# EAGLE board 909 Rim (EAGLE 9.0.0)
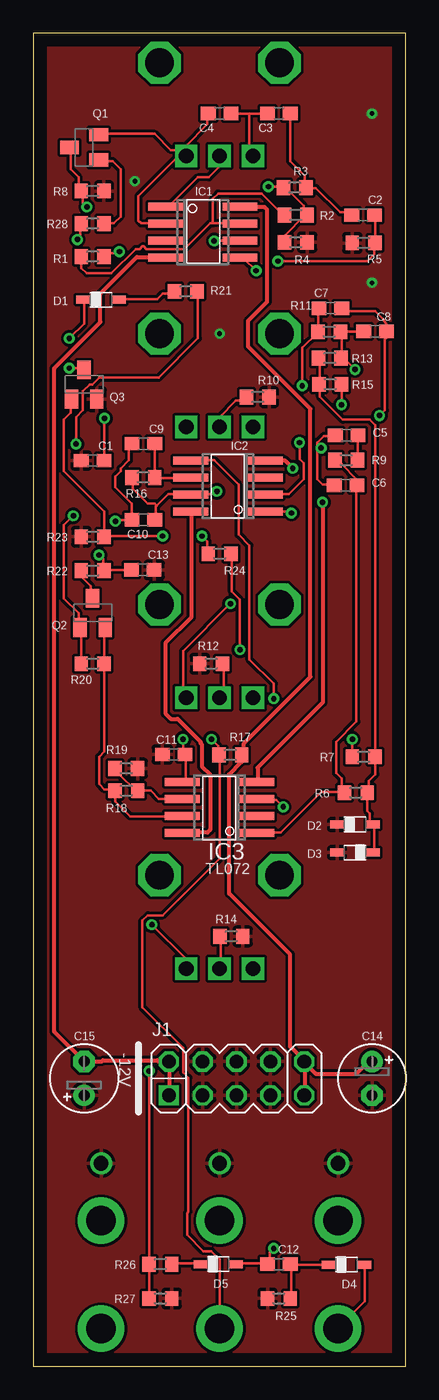
[diagram p0: board, top side]
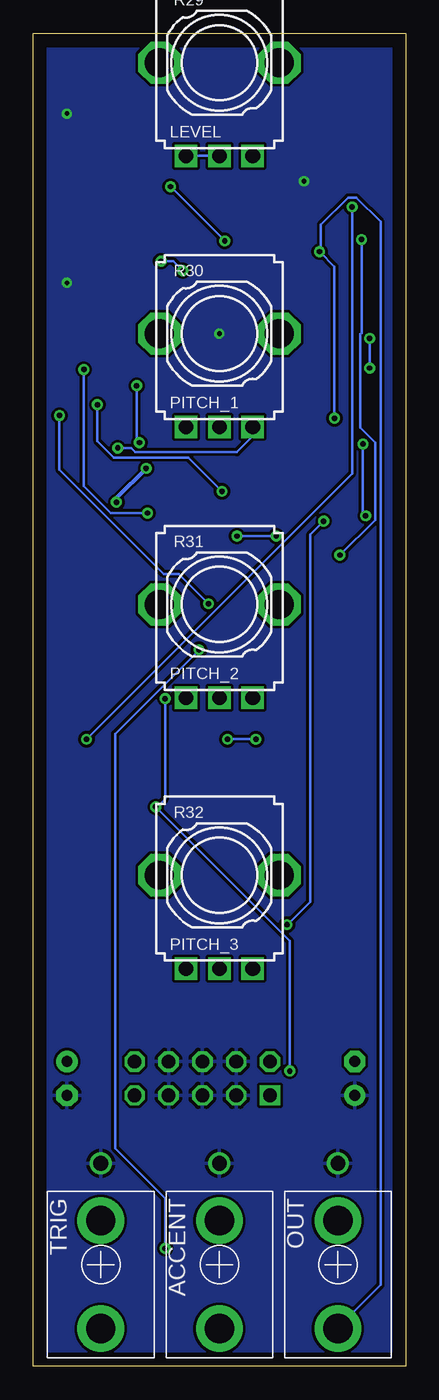
[diagram p1: board, bottom side, seen from below]

Size 27.92 x 100 mm. Coordinates in mm from the lower left corner, seen from the top.
Outline: 0,0 27.92,0 27.92,100 0,100 0,0
Copper layers (1*16): Top 0.035mm / dielectric 1.5mm / Bottom 0.035mm
Design rules "default *": minimum track width 8mil, minimum drill 16mil, track to track 8mil, track to pad 8mil, pad to pad 8mil, via to via 8mil, smd to smd 8mil, copper to edge 40mil, drill to drill 8mil, minimum pad ring 10mil, minimum via ring 8mil, stop-mask expansion 4mil, vias tented up to drill 16mil, thermal gap 10mil
Net classes: 0 default: width 0.203 mm, drill 0.406 mm; 1 GND: width 0.305 mm, drill 0.61 mm; 2 12V: width 0.254 mm, drill 0.61 mm

## Footprints (pad centres in the part's own frame; a part is rotated, then mirrored left to right if it is on the bottom)
KOBICONN_PJM301DM_JACK = drill 2.2 pad 3.5: P$1 0,4.8; P$2 0,-3.3 | drill 1.1: P$3 0,-7.6
C0603 = smd 1.1 x 1: 1 -0.85,0; 2 0.85,0
E2,5-5 = drill 0.813 pad 1.6: + -1.27,0 | drill 0.813 pad 1.6 octagon: - 1.27,0
SOD323W_INFINEON = smd 1 x 0.6: A 1.35,0; C -1.35,0
SO08 = smd 0.6 x 2.6: 1 -1.905,-2.8; 2 -0.635,-2.8; 3 0.635,-2.8; 4 1.905,-2.8; 5 1.905,2.8; 6 0.635,2.8; 7 -0.635,2.8; 8 -1.905,2.8
2X05_EUROPWR_OPEN = drill 1.016 square: 1 -5.08,-1.27 | drill 1.016 octagon: 2 -5.08,1.27; 3 -2.54,-1.27; 4 -2.54,1.27; 5 0,-1.27; 6 0,1.27; 7 2.54,-1.27; 8 2.54,1.27; 9 5.08,-1.27; 10 5.08,1.27
SOT23-BEC = smd 1 x 1.4: B -0.95,-1.1; C 0,1.1; E 0.95,-1.1
R0603 = smd 1 x 1.1: 1 -0.85,0; 2 0.85,0
9MM_PLS = drill 1.1 pad 1.676 square: 1 -2.5,-7; 2 0,-7; 3 2.5,-7 | drill 2.159 pad 3.175 octagon: M1 4.5,0; M2 -4.5,0

## Placement (x,y rotation side)
ACCENT  Accent  [KOBICONN_PJM301DM_JACK]  13.97,7.62 180 bottom
C1  10nf  [C0603]  4.45,67.94 180 top
C2  10nf  [C0603]  24.73,86.36 0 top
C3  10nf  [C0603]  18.41,93.98 0 top
C4  220pf  [C0603]  13.97,93.98 0 top
C5  10nf  [C0603]  23.5,69.85 180 top
C6  10nf  [C0603]  23.41,66.09 0 top
C7  27nf  [C0603]  22.28,79.38 0 top
C8  27nf  [C0603]  25.62,77.64 180 top
C9  4.7nf  [C0603]  8.26,69.22 180 top
C10  4.7nf  [C0603]  8.26,63.5 0 top
C11  100pf  [C0603]  10.53,45.9 180 top
C12  15nf  [C0603]  18.41,7.66 180 top
C13  47nf  [C0603]  8.21,59.74 0 top
C14  10uF  [E2,5-5]  25.4,21.59 270 top
C15  10uF  [E2,5-5]  3.81,21.59 90 top
D1  1N4148  [SOD323W_INFINEON]  5.08,80.01 0 top
D2  1N4148  [SOD323W_INFINEON]  24.13,40.64 0 top
D3  1N4148  [SOD323W_INFINEON]  24.13,38.53 180 top
D4  DIODE-1N4148SOD-323  [SOD323W_INFINEON]  23.5,7.62 0 top
D5  1N4148  [SOD323W_INFINEON]  13.87,7.66 0 top
IC1  TL072  [SO08]  12.7,85.09 270 top
IC2  TL072  [SO08]  14.61,66.04 90 top
IC3  TL072  [SO08]  13.97,41.91 90 top
J1  HEADER-EUROPWR_2X05-OPEN  [2X05_EUROPWR_OPEN]  15.24,21.59 0 top
OUT  Accent  [KOBICONN_PJM301DM_JACK]  5.08,7.62 180 bottom
Q1  BC849  [SOT23-BEC]  3.81,91.44 90 top
Q2  BC859  [SOT23-BEC]  4.45,56.52 0 top
Q3  BC849  [SOT23-BEC]  3.81,73.66 0 top
R1  1K  [R0603]  4.45,83.25 0 top
R2  4.7K  [R0603]  19.68,86.36 180 top
R3  22K  [R0603]  19.61,88.42 180 top
R4  4.7K  [R0603]  19.68,84.32 180 top
R5  220K  [R0603]  24.77,84.27 0 top
R6  12K  [R0603]  24.2,43.03 0 top
R7  12K  [R0603]  24.77,45.72 180 top
R8  680R  [R0603]  4.45,88.17 180 top
R9  470k  [R0603]  23.46,67.98 180 top
R10  2.2K  [R0603]  16.83,72.71 180 top
R11  330K  [R0603]  22.2,77.61 0 top
R12  2.2K  [R0603]  13.34,52.7 0 top
R13  12K  [R0603]  22.23,75.64 180 top
R14  2.2K  [R0603]  14.86,32.25 180 top
R15  3.3k  [R0603]  22.27,73.67 180 top
R16  470k  [R0603]  8.26,66.67 0 top
R17  100k  [R0603]  14.78,45.86 0 top
R18  10k  [R0603]  6.99,43.18 0 top
R19  4.7k  [R0603]  6.97,44.84 0 top
R20  1M  [R0603]  4.45,52.7 0 top
R21  47k  [R0603]  11.43,80.64 0 top
R22  2.7k  [R0603]  4.45,59.69 180 top
R23  10k  [R0603]  4.45,62.23 0 top
R24  22k  [R0603]  13.97,60.96 0 top
R25  100k  [R0603]  18.41,5.08 180 top
R26  22k  [R0603]  9.54,7.64 180 top
R27  22k  [R0603]  9.53,5.08 0 top
R28  1M  [R0603]  4.45,85.72 0 top
R29  LEVEL  [9MM_PLS]  13.97,97.79 0 bottom
R30  PITCH_1  [9MM_PLS]  13.97,77.47 0 bottom
R31  PITCH_2  [9MM_PLS]  13.97,57.15 0 bottom
R32  PITCH_3  [9MM_PLS]  13.97,36.83 0 bottom
TRIG  [KOBICONN_PJM301DM_JACK]  22.86,7.62 180 bottom

## Library data of the parts
ACCENT C1-C15 D1-D5 IC1-IC3 J1 OUT Q1-Q3 R1-R32 TRIG = 0000-master

## Nets
+12V [GND]: C14.+ IC1.8 J1.9 J1.10 R17.2
-12V [GND]: C15.- IC1.4 J1.1 J1.2
GND [GND]: ACCENT.P$3 C1.2 C11.2 C13.2 C14.- C15.+ D2.C D3.A J1.3 J1.4 J1.5 J1.6 J1.7 J1.8 OUT.P$3 Q3.E R4.1 R5.1 R8.1 R10.1 R12.1 R14.1 R19.2 R23.1 R25.2 R27.2 TRIG.P$3
N$1: IC1.7 R1.1 R2.2
N$2: C3.1 C4.2 IC1.1 R29.1 R29.2
N$3: C2.1 C3.2 R3.1
N$4: C2.2 IC1.5 R5.2
N$5: IC1.6 R2.1 R3.2 R4.2
N$6: C1.1 OUT.P$1 R1.2
N$7: C4.1 IC1.2 Q1.E R29.3
N$8: D2.A D3.C R6.2 R7.1 R13.2 R15.2
N$9: C6.2 IC3.1 R6.1 R9.2
N$10: Q1.C R7.2 R8.2
N$11: C5.1 R9.1
N$12: R10.2 R30.2
N$13: C7.2 C8.1 R31.3
N$14: C9.2 C10.1 R32.3
N$15: C10.2 IC2.7 R15.1 R16.1
N$16: C5.2 C6.1 R30.3
N$17: C8.2 IC2.1 R11.2 R13.1
N$18: C9.1 IC2.6 R16.2
N$19: Q1.B R28.2
N$20: ACCENT.P$1 C11.1 IC3.5 R17.1
N$21: IC3.6 R18.2 R19.1
N$22: IC3.7 Q2.E R18.1 R20.2
N$23: Q2.B R20.1 R21.2
N$24: Q2.C R22.2
N$25: D1.A R21.1
N$26: D5.C R26.1
N$27: C12.1 D4.C R25.1
N$28: C12.2 D5.A R24.2
N$29: IC2.5 IC3.3 R26.2 R27.1
N$30: Q3.B R23.2 R24.1
N$31: D1.C Q3.C
N$32: C13.1 R22.1 R28.1
N$33: R12.2 R31.2
N$34: D4.A TRIG.P$1
N$35: R14.2 R32.2
N$37: C7.1 IC2.2 R11.1
V+ [GND]: IC2.8 IC3.8
V- [GND]: IC2.4 IC3.4

## Tracks (layer width: path | path; a pad name or v marks a point on that pad's centre or on a via)
+12V
  Top 0.305: J1.10 20.37,22.86 19.25,23.98 19.25,30.89 14.68,35.46 14.68,44.4 15.6,45.31 15.6,45.82 R17.2 15.7,45.92 15.8,46.02 15.8,46.74 20.78,51.71 20.78,71.83 16.1,76.5 16.1,78.44 17.53,79.86 17.53,86.77 17.32,86.97 15.6,86.97 IC1.8 | J1.9 20.37,20.32 20.37,22.76 J1.10 | C14.+ 25.15,22.86 24.23,21.95 21.18,21.95 20.47,22.66 J1.10
-12V
  Top 0.305: J1.1 10.21,20.32 10.21,22.86 J1.2 9.4,22.86 9.3,22.96 5.23,22.96 5.13,22.86 C15.- 1.58,25.09 1.58,74.88 5.03,78.33 5.03,80.47 7.77,83.21 9.8,83.21 IC1.4
GND  (via drill 0.35)
  other vias: 7.62,88.9 25.4,81.28 13.97,77.47 25.4,93.98
  pour Top: 0,100.33 27.94,100.33 27.94,0 0,0
  pour Bottom: 0,99.06 27.94,99.06 27.94,0 0,0
N$1
  Top 0.203: 13.46,85.75 15.49,85.75 IC1.7 | 13.46,85.75 13.26,85.75 11.33,83.82 8.48,83.82 8.28,84.02 8.18,84.02 7.98,83.82 7.67,83.82 5.84,81.99 4.01,81.99 3.61,82.4 3.61,83.21 R1.1 | 13.46,85.75 13.46,87.58 13.87,87.99 17.12,87.99 18.75,86.36 R2.2
N$2
  Top 0.203: C3.1 16.21,93.98 | 16.21,93.98 C4.2 | 16.21,93.98 16.21,91.03 16.41,90.83 R29.1 | R29.2 13.97,90.02 13.16,89.2 12.34,89.2 10.21,87.07 9.91,87.07 IC1.1
  Bottom 0.203: R29.1 16.41,90.83 13.97,90.83 R29.2
N$3
  Top 0.203: C2.1 23.82,86.36 23.62,86.56 23.01,86.56 21.18,88.39 20.47,88.39 R3.1 20.37,88.49 20.37,89.31 19.25,90.42 19.25,93.98 C3.2
N$4  (via drill 0.41)
  Top 0.203: C2.2 25.65,86.36 25.65,84.33 R5.2 25.55,84.23 25.55,83.41 25.04,82.91 v18.34,82.91 | v16.71,82.19 15.8,83.11 15.6,83.11 IC1.5
  Bottom 0.203: v18.34,82.91 17.42,82.91 v16.71,82.19
N$5  (via drill 0.41)
  Top 0.203: R4.2 18.85,84.33 18.85,84.84 20.37,86.36 R2.1 20.27,86.36 20.27,87.07 19.25,88.09 19.15,88.09 18.85,88.39 R3.2 18.75,88.49 v17.63,88.49 | v13.56,84.43 15.49,84.43 IC1.6
  Bottom 0.203: v17.63,88.49 v13.56,84.43
N$6  (via drill 0.41)
  Top 0.203: v5.33,71.12 5.33,67.97 C1.1 | v6.45,83.62 6.35,83.52 5.54,83.52 5.33,83.31 R1.2
  Bottom 0.203: v5.33,71.12 5.33,82.5 v6.45,83.62 6.35,83.62 6.35,85.65 4.32,87.68 3.71,87.68 1.88,85.85 1.88,6.1 5.13,2.85 OUT.P$1
N$7
  Top 0.203: 11.43,91.24 11.43,90.83 R29.3 | 11.43,91.24 11.43,91.54 13.06,93.17 13.06,93.98 C4.1 | 11.43,91.24 10.82,91.24 | 10.82,91.24 10.31,91.24 9.09,92.46 4.93,92.46 Q1.E | 11.43,91.24 R29.3 | 10.82,91.24 10.82,90.73 7.87,87.78 7.87,85.95 8.08,85.75 9.8,85.75 IC1.2 | 10.82,91.24 R29.3
N$8
  Top 0.203: R13.2 21.39,75.59 21.49,75.49 21.49,73.76 R15.2 21.49,73.66 21.49,72.75 23.22,71.02 25.25,71.02 25.65,70.61 25.65,45.72 | D3.C 25.55,38.61 25.55,40.64 D2.A 25.45,40.64 25.25,40.84 25.25,41.45 25.04,41.66 25.04,42.98 R6.2 25.15,43.08 25.15,43.89 25.65,44.4 25.65,45.72 | 25.65,45.72 R7.1
N$9
  Top 0.203: R9.2 22.71,67.97 23.01,67.67 23.11,67.67 24.23,66.55 24.23,66.14 C6.2 24.23,66.04 24.23,48.36 22.71,46.84 22.71,44.5 23.11,44.09 23.11,43.08 | 23.11,43.08 21.59,43.08 18.54,40.03 16.82,40.03 IC3.1 | 23.11,43.08 23.32,43.08 R6.1 23.11,43.08
N$10  (via drill 0.41)
  Top 0.203: v23.93,47.04 23.93,45.72 R7.2 | v4.01,86.97 3.71,87.27 3.71,87.99 3.61,88.09 R8.2 3.51,88.19 3.4,88.29 3.4,89.2 2.79,89.81 2.79,91.44 Q1.C
  Bottom 0.203: v23.93,47.04 4.01,66.95 v4.01,86.97
N$11
  Top 0.203: R9.1 24.33,68.07 24.33,69.8 C5.1
N$12
  Top 0.203: R30.2 13.97,71.22 15.19,72.44 16.21,72.44 R10.2
N$13  (via drill 0.41)
  Top 0.203: C7.2 23.22,79.35 23.42,79.15 25.65,79.15 26.26,78.54 26.26,78.44 26.47,78.23 26.47,77.72 C8.1 26.47,77.62 26.47,77.11 26.37,77.01 26.37,71.73 v25.96,71.32 | v14.78,57.2 11.23,53.65 11.23,50.39 11.43,50.19 R31.3
  Bottom 0.203: v25.96,71.32 25.96,67.26 18.14,59.44 17.02,59.44 v14.78,57.2
N$14  (via drill 0.41)
  Top 0.203: 7.37,63.5 7.37,64.72 6.15,65.94 6.15,66.75 6.55,67.16 6.55,67.36 7.16,67.97 7.16,68.99 7.37,69.19 C9.2 | 7.37,63.5 6.25,63.5 v6.15,63.4 | v8.89,33.12 11.43,30.58 11.43,29.87 R32.3 | 7.37,63.5 C10.1
  Bottom 0.203: v6.15,63.4 7.16,62.38 7.16,34.85 v8.89,33.12
N$15  (via drill 0.41)
  Top 0.203: 9.25,64.57 10.11,65.43 11.74,65.43 IC2.7 11.84,65.43 13.56,65.43 v13.77,65.63 | 9.25,64.57 9.2,64.52 9.2,63.5 C10.2 | 9.25,64.57 9.09,64.72 8.59,64.72 7.47,65.84 7.47,66.65 R16.1 | v23.11,72.14 R15.1
  Bottom 0.203: v23.11,72.14 23.11,69.39 21.89,68.17 16.31,68.17 v13.77,65.63
N$16  (via drill 0.41)
  Top 0.203: 21.29,68.89 21.29,69.29 21.79,69.8 22.61,69.8 C5.2 | 21.29,68.89 21.29,66.55 21.69,66.14 22.5,66.14 C6.1 | v21.59,68.89 21.29,68.89
  Bottom 0.203: v21.59,68.89 20.57,68.89 20.27,68.58 12.65,68.58 11.53,69.7 11.53,70.41 R30.3
N$17  (via drill 0.41)
  Top 0.203: C8.2 24.74,77.62 23.11,77.62 R11.2 23.11,77.52 23.11,75.69 R13.1 23.22,75.69 v24.13,74.78 | v19.36,64.01 19.25,64.11 17.42,64.11 IC2.1
  Bottom 0.203: v24.13,74.78 24.13,66.04 22.1,64.01 v19.36,64.01
N$18
  Top 0.203: IC2.6 11.74,66.65 9.2,66.65 R16.2 9.09,66.75 9.09,69.19 C9.1
N$19
  Top 0.203: R28.2 5.33,85.75 6.04,85.75 6.55,86.26 6.55,89.81 5.94,90.42 4.93,90.42 Q1.B
N$20  (via drill 0.41)
  Top 0.203: IC3.5 11.23,43.89 11.43,44.09 11.43,45.82 C11.1 11.33,45.92 11.23,46.02 v11.23,47.04 | v13.36,47.04 13.87,46.53 13.87,45.92 R17.1 13.97,45.82 13.97,38.1 9.7,33.83 8.59,33.83 8.18,33.43 8.18,26.92 11.23,23.88 11.23,22.05 11.63,21.64 11.63,11.58 11.53,11.48 11.53,9.86 12.75,8.64 13.36,8.64 13.97,8.03 ACCENT.P$1
  Bottom 0.203: v11.23,47.04 v13.36,47.04
N$21
  Top 0.203: IC3.6 11.12,42.57 9.4,42.57 8.79,43.18 R18.2 7.67,43.18 6.45,44.4 6.45,44.5 6.15,44.81 R19.1
N$22
  Top 0.203: Q2.E 5.33,55.37 5.33,52.73 R20.2 5.33,52.63 5.33,46.13 4.93,45.72 4.93,43.69 5.33,43.28 5.94,43.28 6.04,43.18 R18.1 6.15,42.37 7.26,41.25 11.12,41.25 IC3.7
N$23  (via drill 0.41)
  Top 0.203: R20.1 3.61,52.73 3.61,55.27 3.51,55.37 Q2.B 3.4,55.47 3.4,56.49 2.29,57.61 2.29,63.09 v3,63.8 | v3.2,69.19 3.2,71.22 3.71,71.73 3.71,73.15 4.22,73.66 4.42,73.66 4.93,74.17 9.4,74.17 12.34,77.11 12.34,80.57 R21.2
  Bottom 0.203: v3.2,69.19 3.2,64.01 v3,63.8
N$24
  Top 0.203: R22.2 3.61,59.64 3.61,59.23 4.32,58.52 4.32,57.81 4.42,57.71 Q2.C
N$25
  Top 0.203: D1.A 6.45,80.06 9.3,80.06 9.7,80.47 10.41,80.47 10.52,80.57 R21.1
N$26
  Top 0.203: D5.C 12.45,7.72 10.41,7.72 R26.1
N$27
  Top 0.203: D4.C 19.36,7.62 C12.1 19.36,7.52 19.36,5.08 R25.1
N$28  (via drill 0.41)
  Top 0.203: D5.A 15.29,7.72 17.53,7.72 C12.2 17.53,7.82 17.73,8.03 17.73,8.53 v18.03,8.84 | v15.49,53.75 15.49,57.51 14.88,58.12 14.88,60.96 R24.2
  Bottom 0.203: v15.49,53.75 21.79,47.45 21.79,16.36 18.03,12.6 v18.03,8.84
N$29  (via drill 0.41)
  Top 0.203: R27.1 8.69,7.62 R26.2 8.69,7.72 v8.69,22.15 | v18.75,41.96 18.24,42.47 16.82,42.47 IC3.3 | v18.03,50.09 18.03,51.21 16.21,53.03 16.21,61.57 15.39,62.38 15.39,66.14 13.56,67.97 11.84,67.97 IC2.5
  Bottom 0.203: v8.69,22.15 8.69,31.9 v18.75,41.96 18.64,41.96 18.03,42.57 v18.03,50.09
N$30  (via drill 0.41)
  Top 0.203: Q3.B 2.79,72.54 2.79,71.53 2.29,71.02 2.29,67.16 5.33,64.11 5.33,62.28 R23.2 5.44,62.28 v9.7,62.28 | v12.65,62.28 13.06,61.87 13.06,60.96 R24.1
  Bottom 0.203: v9.7,62.28 v12.65,62.28
N$31  (via drill 0.41)
  Top 0.203: v2.69,77.11 3.81,78.23 3.81,79.96 D1.C | v2.69,74.88 3.71,74.88 3.81,74.78 Q3.C
  Bottom 0.203: v2.69,74.88 v2.69,77.11
N$32  (via drill 0.41)
  Top 0.203: C13.1 7.26,59.74 5.33,59.74 R22.1 5.23,59.74 5.23,60.55 v4.93,60.86 | v3.3,84.53 3.51,84.73 3.51,85.65 R28.1
  Bottom 0.203: v3.3,84.53 3.3,77.52 3.4,77.42 3.4,70.41 2.29,69.29 2.29,63.5 v4.93,60.86
N$33
  Top 0.203: R12.2 14.28,52.63 14.28,50.49 13.97,50.19 R31.2
N$34
  Top 0.203: D4.A 24.84,4.88 22.81,2.85 TRIG.P$1
N$35
  Top 0.203: R14.2 14.07,32.21 14.07,29.97 13.97,29.87 R32.2
N$37  (via drill 0.41)
  Top 0.203: C7.1 21.39,79.35 21.39,77.62 R11.1 21.29,77.52 20.17,76.4 v20.17,73.56 | v19.96,69.29 19.96,68.07 20.27,67.77 20.27,66.55 19.15,65.43 17.42,65.43 IC2.2
  Bottom 0.203: v20.17,73.56 20.17,69.49 v19.96,69.29
V+
  Top 0.305: IC3.8 11.23,40.03 13.06,40.03 13.26,40.23 13.26,44.4 12.65,45.01 12.65,46.63 12.55,46.74 12.55,46.84 10.82,48.56 10.31,48.56 9.91,48.97 9.91,54.25 11.84,56.19 11.84,64.11 IC2.8
V-  (via drill 0.41)
  Top 0.305: v21.69,64.82 21.69,49.78 16.82,44.91 16.82,43.89 IC3.4 | v19.46,67.36 18.85,67.97 17.42,67.97 IC2.4
  Bottom 0.305: v21.69,64.82 21.69,65.13 v19.46,67.36

## Text on the board
tDocu: 909 Rim